# Altium PCB BrakelightPCB.PcbDoc
Units mil, origin at the board's own origin, x right, y up, seen from the top; angles counter-clockwise.
Board outline 5980 x 3985 mil, 2 copper layers (Top Layer, Bottom Layer); 62 components, 43 nets, 128 pads, 0 vias.
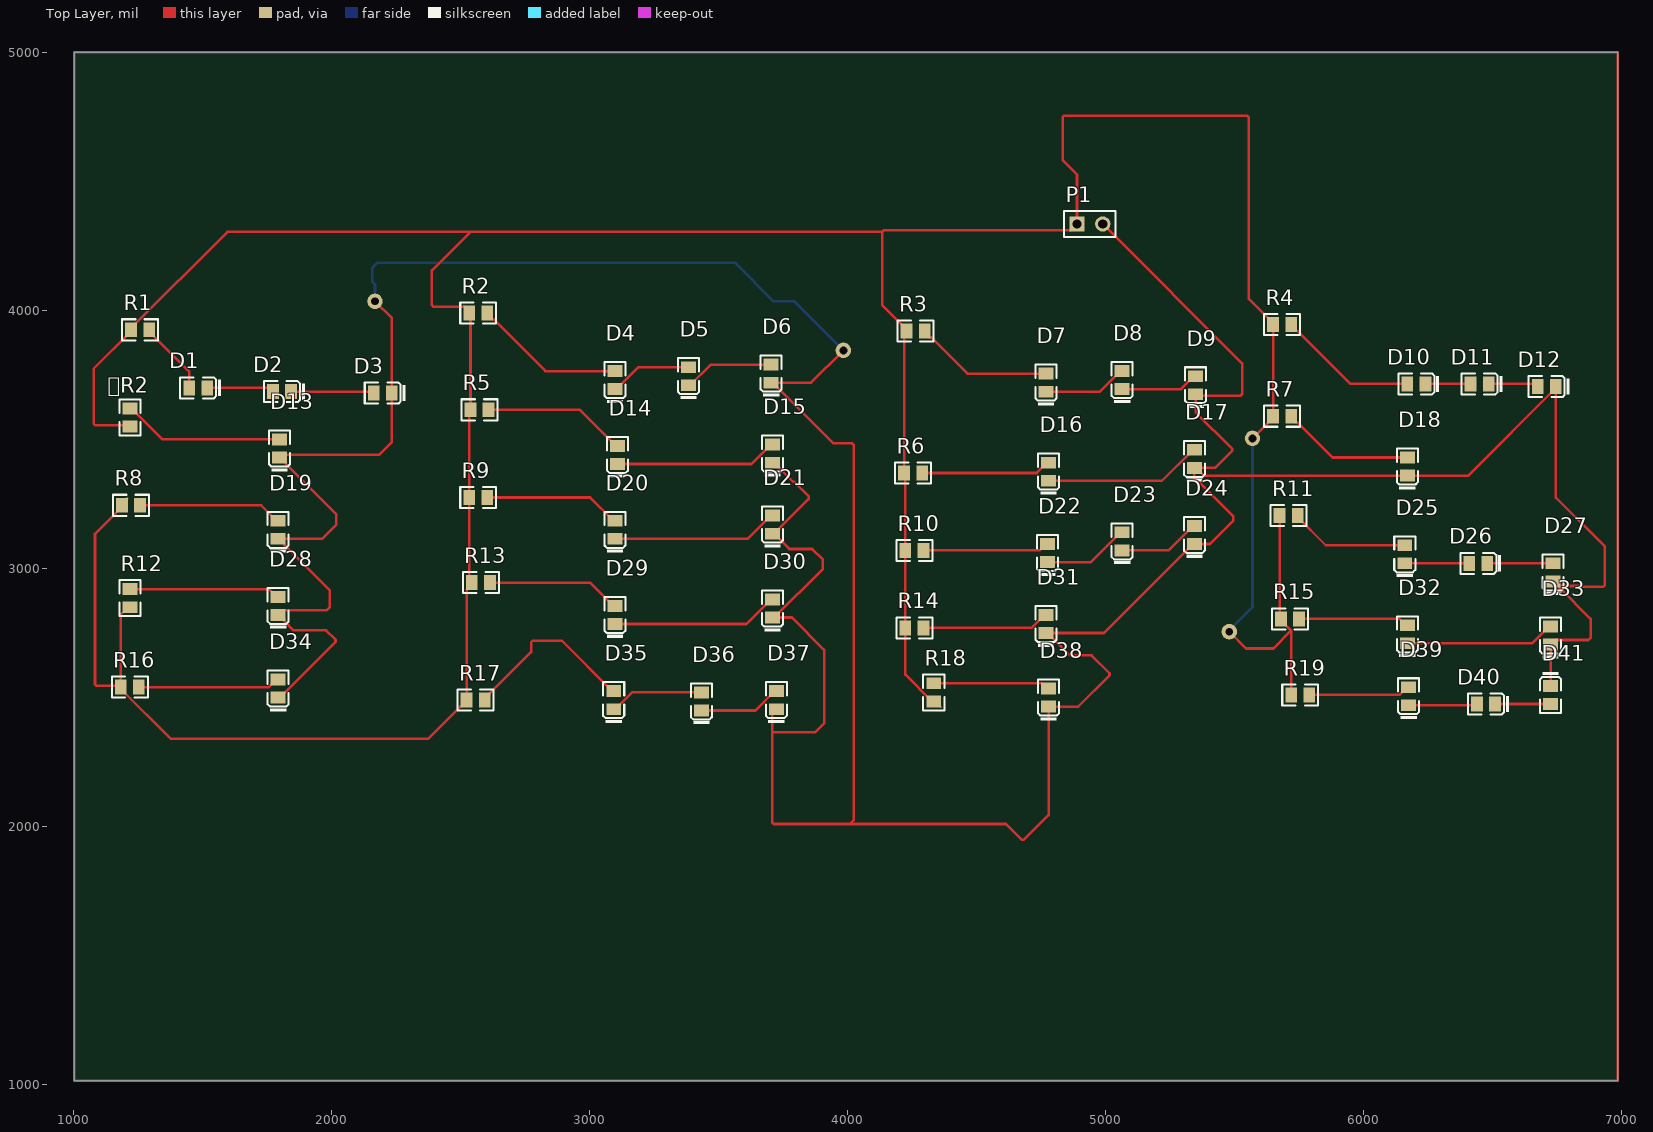
[diagram p0: Top Layer view]
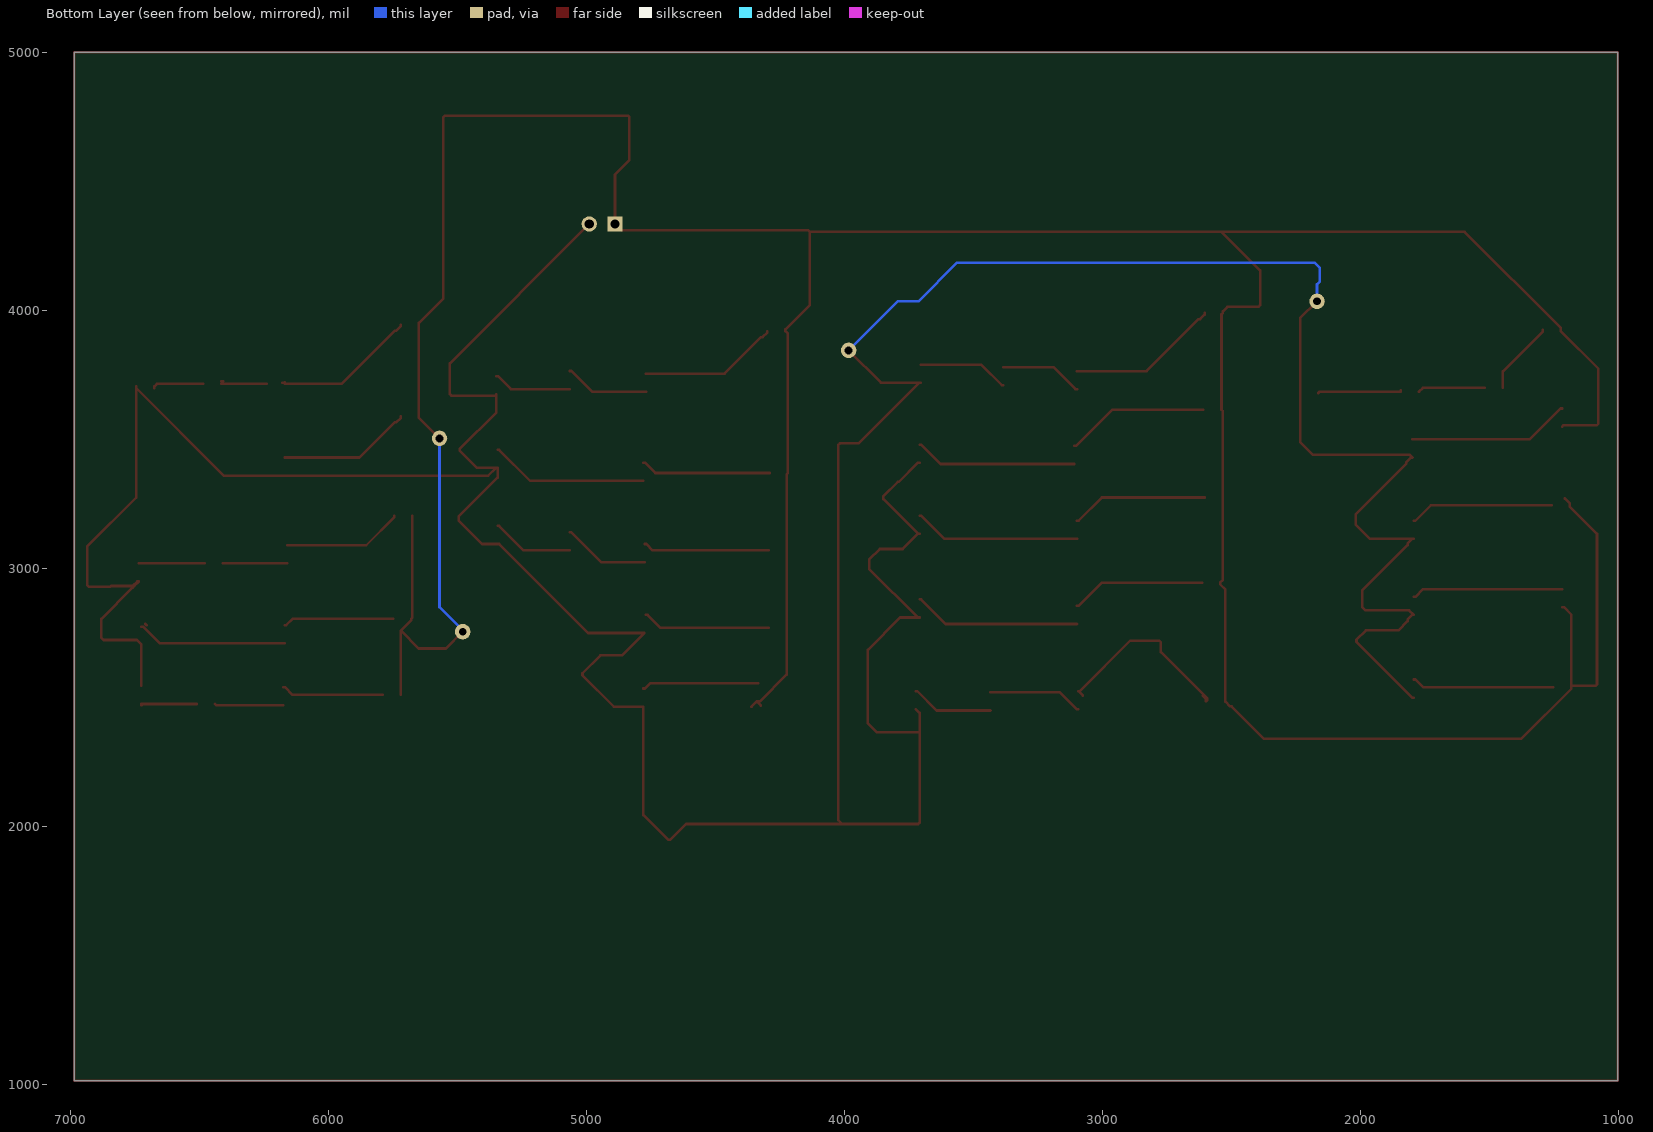
[diagram p1: Bottom Layer view, seen from below]
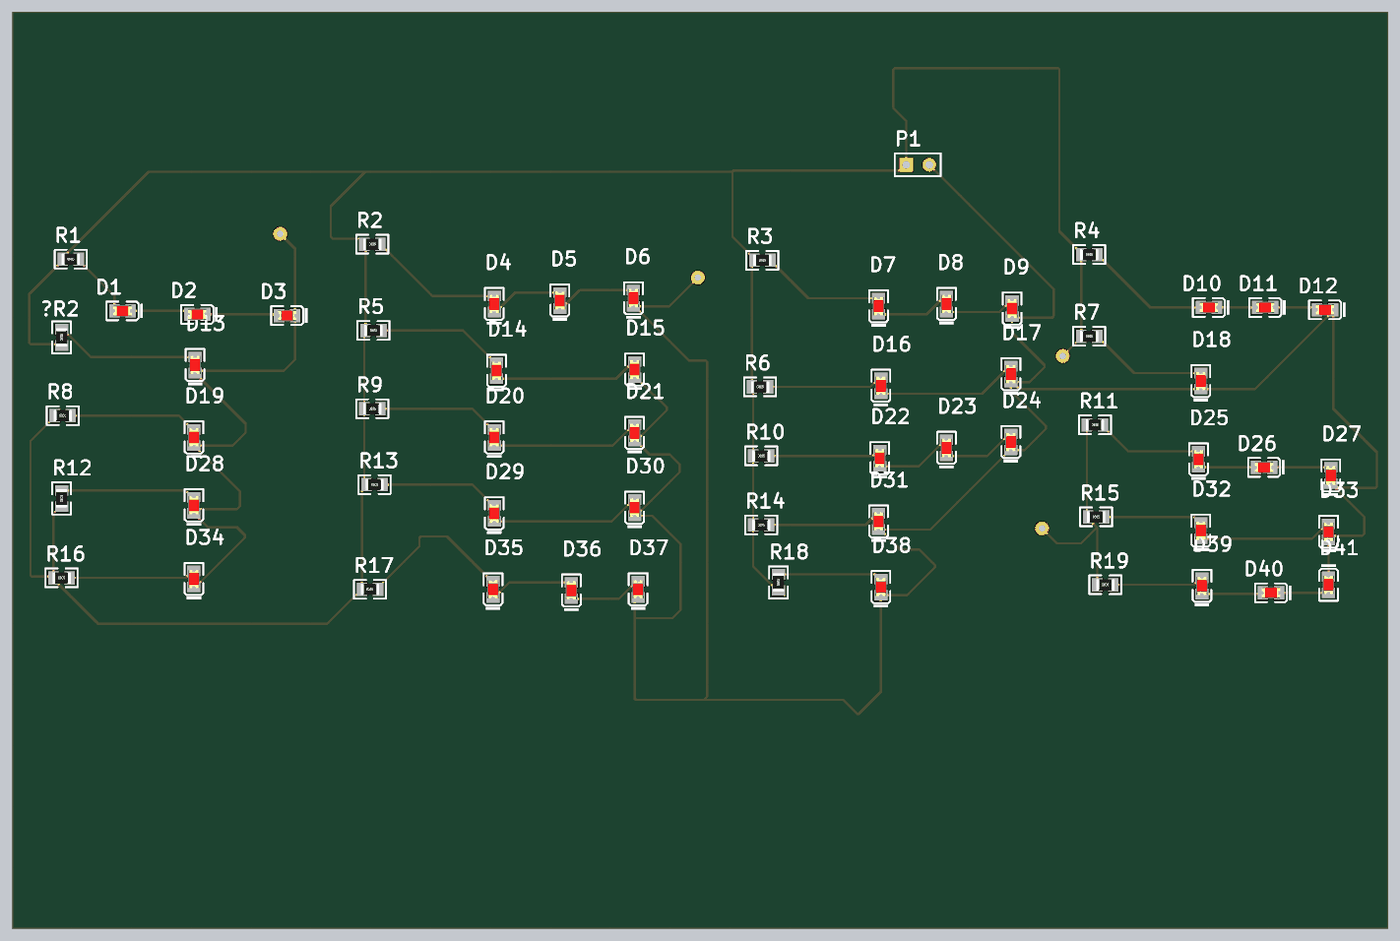
[diagram p2: 3D render of the assembled board from above, using the file's embedded part models]

## Layer stack, top to bottom
Top Solder: solder mask 0.4, Solder Resist, Dk 3.5
Top Layer: signal copper 1.4
Dielectric 1: dielectric 12.6, FR-4, Dk 4.8
Bottom Layer: signal copper 1.4
Bottom Solder: solder mask 0.4, Solder Resist, Dk 3.5

## Board outline
1005,1015 1005,5000 6985,5000 6985,1015

## Design rules (kind name [scope] priority, off if disabled: settings)
Clearance [All] p1: gap=10 ignorepadtopadclearanceinfootprint=FALSE except(0: Arc-Hole Track-Hole SMDPad-Hole THPad-Hole Via-Hole Fill-Hole Poly-Hole Region-Hole Text-Hole)
PolygonConnect [All] p1: connectstyle=Relief reliefconductorwidth=10 reliefentries=4 polygonreliefangle="90 Angle" airgapwidth=10
RoutingVias [All] p1: holewidth=28 width=50 viastyle="Through Hole" minholewidth=28 minwidth=50 maxholewidth=28 maxwidth=50
SolderMaskExpansion [All] p1: expansion=4 istentingtop=FALSE
Width [All] p1: maxlimit=10 minlimit=10 preferedwidth=10
30 further rules are at their usual default settings.

## Classes and differential pairs
component class BrakeLight: R2 D1 D2 D3 D4 D5 D6 D7 D8 D9 D10 D11 D12 D13 D14 D15 D16 D17 D18 D19 D20 D21 D22 D23 D24 D25 D26 D27 D28 D29 D30 D31 D32 D33 D34 D35 D36 D37 D38 D39 D40 D41 D? P1 R1 R2 R3 R4 R5 R6 R7 R8 R10 R11 R14 R16

## Components (designator, comment, footprint, x,y, rotation, side; value= is the part's Value field where it differs from the comment)
R2 "330Ω ±1%" 0805_R 1220,3585 r90 top (schematic designator R1)
D1 "0805 Red" 0805_LED_S1 1485,3700 r180 top
D2 "0805 Red" 0805_LED_S1 1809.96,3685 r180 top
D3 "0805 Red" 0805_LED_S1 2200,3680 r180 top
D4 "0805 Red" 0805_LED_S1 3100,3729.96 r90 top
D5 "0805 Red" 0805_LED_S1 3385,3745.04 r90 top
D6 "0805 Red" 0805_LED_S1 3705,3755 r90 top
D7 "0805 Red" 0805_LED_S1 4770,3719.96 r90 top
D8 "0805 Red" 0805_LED_S1 5065,3730.04 r90 top
D9 "0805 Red" 0805_LED_S1 5350,3710 r90 top
D10 "0805 Red" 0805_LED_S1 6204.96,3715 r180 top
D11 "0805 Red" 0805_LED_S1 6450,3715 r180 top
D12 "0805 Red" 0805_LED_S1 6710,3705 r180 top
D13 "0805 Red" 0805_LED_S1 1800,3464.96 r90 top
D14 "0805 Red" 0805_LED_S1 3110,3440.04 r90 top
D15 "0805 Red" 0805_LED_S1 3710,3445 r90 top
D16 "0805 Red" 0805_LED_S1 4780,3374.96 r90 top
D17 "0805 Red" 0805_LED_S1 5345,3424.96 r90 top
D18 "0805 Red" 0805_LED_S1 6170,3394.96 r90 top
D19 "0805 Red" 0805_LED_S1 1795,3149.96 r90 top
D20 "0805 Red" 0805_LED_S1 3100,3149.96 r90 top
D21 "0805 Red" 0805_LED_S1 3710,3169.96 r90 top
D22 "0805 Red" 0805_LED_S1 4775,3059.96 r90 top
D23 "0805 Red" 0805_LED_S1 5065,3105 r90 top
D24 "0805 Red" 0805_LED_S1 5345,3130 r90 top
D25 "0805 Red" 0805_LED_S1 6160,3055.04 r90 top
D26 "0805 Red" 0805_LED_S1 6444.96,3020 r180 top
D27 "0805 Red" 0805_LED_S1 6735,2984.96 r90 top
D28 "0805 Red" 0805_LED_S1 1795,2855.04 r90 top
D29 "0805 Red" 0805_LED_S1 3100,2819.96 r90 top
D30 "0805 Red" 0805_LED_S1 3710,2845 r90 top
D31 "0805 Red" 0805_LED_S1 4770,2785 r90 top
D32 "0805 Red" 0805_LED_S1 6170,2745 r90 top
D33 "0805 Red" 0805_LED_S1 6725,2740 r90 top
D34 "0805 Red" 0805_LED_S1 1795,2534.96 r90 top
D35 "0805 Red" 0805_LED_S1 3095,2490 r90 top
D36 "0805 Red" 0805_LED_S1 3435,2484.96 r90 top
D37 "0805 Red" 0805_LED_S1 3725,2490 r90 top
D38 "0805 Red" 0805_LED_S1 4780,2499.96 r90 top
D39 "0805 Red" 0805_LED_S1 6175,2505 r90 top
D40 "0805 Red" 0805_LED_S1 6475,2475 r180 top
D41 "0805 Red" 0805_LED_S1 6725,2510 r270 top
P1 "Header 2" HDR1X2 4890,4335 r0 top
R1 "150Ω ±1%" 0805_R 1260,3925 r0 top
R2 "150Ω ±1%" 0805_R 2570,3990 r0 top
R3 "150Ω ±1%" 0805_R 4265,3920 r0 top
R4 "150Ω ±1%" 0805_R 5685,3945 r0 top
R5 "220Ω ±1%" 0805_R 2575.04,3615 r0 top
R6 "220Ω ±1%" 0805_R 4255,3370 r0 top
R7 "330Ω ±1%" 0805_R 5684.96,3590 r0 top
R8 "330Ω ±1%" 0805_R 1225,3245 r0 top
R9 "220Ω ±1%" 0805_R 2570.04,3275 r0 top
R10 "150Ω ±1%" 0805_R 4260,3070 r0 top
R11 "150Ω ±1%" 0805_R 5709.96,3205 r0 top
R12 "330Ω ±1%" 0805_R 1220,2884.96 r90 top
R13 "220Ω ±1%" 0805_R 2580.04,2945 r0 top
R14 "330Ω ±1%" 0805_R 4259.96,2770 r0 top
R15 "220Ω ±1%" 0805_R 5715,2805 r0 top
R16 "330Ω ±1%" 0805_R 1220,2540 r0 top
R17 "150Ω ±1%" 0805_R 2560,2490 r0 top
R18 "330Ω ±1%" 0805_R 4335,2520 r90 top
R19 "150Ω ±1%" 0805_R 5754.96,2510 r0 top

## Footprints (in the part's own frame and the unit in brackets; to place one, negate y for a bottom-side part, rotate by r counter-clockwise, add the part's x,y. Pads: shape width x height; smd on the part's side, far side on the other; paste and mask are expansions set on the pad)
0805_LED_S1 [mm]
  rect 1.16x1.47 smd: A(0.89,0) K(-0.89,0)
  silkscreen extent -2.25,-1.04 1.77,1.03, body extent -1.01,-0.62 1.01,0.62, height 1.1
0805_R [mm]
  rect 1.16x1.47 smd: 1(-0.89,0) 2(0.89,0)
  silkscreen extent -1.77,-1.04 1.77,1.03, body extent -1,-0.62 1,0.63, height 0.49
HDR1X2 [mm] "Connector; Header; 2 Position"
  rect 1.5x1.5 hole 0.9: 1(0,0)
  round 1.5 hole 0.9: 2(2.54,0)
  silkscreen extent -1.27,-1.27 3.81,1.27

## Part data
R2 R1 R2 R3 R4 R5 R6 R7 R8 R9 R10 R11 R12 R13 R14 R15 R16 R17 R18 R19: library part "0805 1K (1001) 1%", "Chip resistor", Manufacturer="Uniroyal Elec", Package=0805, PartNumber=0805W8F1001T5E, Power=1/8W, Resistance=1KΩ, SuppliersPartNumber=C17513, Tolerance=1%, ComponentLink1Description="Supplier link", ComponentLink1URL=http://www.szlcsc.com/product/details_18201.html, Supplier=LC
D1 D2 D3 D4 D5 D6 D7 D8 D9 D10 D11 D12 D13 D14 D15 D16 D17 D18 D19 D20 D21 D22 D23 D24 D25 D26 D27 D28 D29 D30 D31 D32 D33 D34 D35 D36 D37 D38 D39 D40 D41: library part "0805 LED Red", "LED", Color=Red, Manufacturer="Foshan NationStar Optoelectronics", Package=0805, PartNumber=FC-2012HRK-620D, SuppliersPartNumber=C84256, ComponentLink1Description=供应商链接, ComponentLink1URL=http://www.szlcsc.com/product/details_2668.html, Supplier=LC
P1: "Header, 2-Pin", LatestRevisionDate=17-Jul-2002, LatestRevisionNote="Re-released for DXP Platform.", Publisher="Altium Limited"

## Free pads (board coordinates)
  round 60 hole 30: 3(2170,4035) 4(3985,3845) 5(5570,3503.98) 6(5480,2755)

## Nets (pads, with @x,y where several pads share a name; then routed paths per layer and width w, separated by ;. In a path a pad name is that pad's centre, name@x,y a point inside that pad or via, vN(x,y) a via of type N, cw(c..) or ccw(c..) an arc to the next point about the centre after c; other vN are vias at no path point)
+12: R2.1 P1.1 pad.5 pad.6 R1.1 R2.1 R3.1 R4.1 R5.1 R6.1 R7.1 R8.1 R9.1 R10.1 R11.1 R12.1 R13.1 R14.1 R15.1 R16.1 R17.1 R18.1 R19.1 | length 15382.7
  Top Layer w10: R8.1@1210,3271.14 1189.96,3251.1 R8.1 1189.96,3238.9 1085,3133.94 1085,2550.86 1090.86,2545 1179.96,2545 R16.1 ; R12.1 1213.9,2849.92 1184.96,2820.98 R16.1 ; R2.1 1214.96,3555 1085.86,3555 1080,3560.86 1080,3773.94 1224.96,3918.9 R1.1 1224.96,3931.1 1598.47,4304.61 2539.61,4304.61 ; R13.1@2545,2938.9 2524.96,2918.86 R17.1 2524.96,2483.9 2507.13,2466.06 2501.02,2466.06 2374.96,2340 1378.86,2340 1184.96,2533.9 R16.1 ; R13.1 2535,2955 R9.1 2535,3610 R5.1 2540,3984.96 R2.1 2534.96,3996.1 2517.13,4013.94 2396.92,4013.94 2390,4020.86 2390,4155 2539.61,4304.61 ; R18.1@4325,2468.86 R18.1@4338.05,2481.91 ; R18.1@4361.14,2464.92 4341.1,2484.96 R18.1 4328.9,2484.96 4224.92,2588.94 R14.1 4224.92,3069.96 R10.1 4224.96,3365 4223.01,3366.95 R6.1 4219.96,3910 R3.1 4229.96,3926.1 4135,4021.06 4135,4304.61 ; pad.6 5545,2690 5650.98,2690 5719.92,2758.94 ; pad.5@5570,3495 pad.5 5649.92,3583.9 R7.1 5649.96,3590.04 R4.1 5649.96,3951.1 5555,4046.06 5555,4749.14 5549.14,4755 4840,4755 4834.14,4749.14 4834.14,4582.26 4890,4526.41 P1.1 4865.47,4310.47 4140.86,4310.47 4135,4304.61 ; R11.1 5674.92,2810.04 R15.1 5679.96,2798.9 5719.92,2758.94 ; R19.1 5719.92,2758.94 ; 2539.61,4304.61 4135,4304.61
  Bottom Layer w10: pad.6@5470,2750 5570,2850 pad.5
GND: D3.K D6.K D9.K D12.K D13.K D15.K D17.K D18.K D19.K D21.K D24.K D27.K D28.K D30.K D31.K D33.K D34.K D37.K D38.K D41.K P1.2 pad.3 pad.4 | length 17290.6
  Top Layer w10: D34.K 1801.1,2499.92 2017.04,2715.86 2017.04,2724.14 1981.08,2760.1 1854.9,2760.1 1818.94,2796.06 1818.94,2802.17 1801.1,2820 D28.K 1812.83,2837.83 1981.98,2837.83 1995,2850.86 1995,2914.92 1818.94,3090.98 1818.94,3097.09 D19.K@1801.1,3114.92 ; D19.K D19.K@1801.1,3114.92 ; pad.3 2235.04,3969.96 D3.K 2235.04,3490.04 2185,3440 1810.08,3440 D13.K 1806.1,3429.92 1823.94,3412.09 1823.94,3405.98 2020,3209.92 2020,3170 1964.92,3114.92 D19.K@1801.1,3114.92 ; D6.K D6.K@3711.1,3719.96 ; D30.K D30.K@3716.1,2809.96 ; D21.K D21.K@3716.1,3134.92 ; D15.K 3716.1,3409.96 3790,3336.06 3793.94,3336.06 3850,3280 3850,3268.82 D21.K@3716.1,3134.92 ; D37.K 3710,2439.96 3710,2365 ; pad.4 3859.96,3719.96 D6.K@3711.1,3719.96 ; P1.2 5530,3795 5530,3675.86 5524.14,3670 5354.96,3670 D9.K 5350,3605 5490.86,3464.14 5490.86,3455.86 5424.92,3389.92 D17.K@5351.1,3389.92 ; D41.K D33.K 6742.83,2722.8 6871.94,2722.8 6880,2730.86 6880,2804.92 6758.94,2925.98 D27.K@6758.94,2932.09 ; D12.K D12.K@6745.04,3698.9 ; 3710,2365 3710,2015.86 3715.86,2010 4010,2010 ; 3710,2365 3875,2365 3910,2400 3910,2685 3785.04,2809.96 D30.K@3716.1,2809.96 ; D6.K@3711.1,3719.96 3946.06,3485 4019.14,3485 4025,3479.14 4025,2025 4010,2010 ; D30.K@3716.1,2809.96 3905,2998.86 3905,3034.14 3863.53,3075.61 3775.41,3075.61 D21.K@3716.1,3134.92 ; 4010,2010 4615,2010 4675.86,1949.14 4684.14,1949.14 4780,2045 D38.K 4894.92,2464.92 5015.86,2585.86 5015.86,2594.14 4946.87,2663.13 4862.93,2663.13 4776.1,2749.96 4993.9,2749.96 5338.9,3094.96 D24.K 5404.96,3094.96 5495.86,3185.86 5495.86,3201.23 5345,3352.09 D17.K D17.K@5351.1,3389.92 ; D17.K@5351.1,3389.92 5381.1,3359.92 D18.K 6406.06,3359.92 D12.K@6745.04,3698.9 ; D12.K@6745.04,3698.9 6745.04,3274.96 6935,3085 6935,2935.86 6929.14,2930 6845.08,2930 6843,2932.09 D27.K@6758.94,2932.09 ; D27.K@6758.94,2932.09 6752.83,2932.09 D27.K 6741.1,2949.92 D27.K@6758.94,2932.09
  Bottom Layer w10: pad.3 2170,4100.91 2159.14,4111.77 2159.14,4164.14 2180,4185 3565,4185 3715,4035 3795,4035 pad.4
NetR1_2: R2.2 D13.A | length 629.7
  Top Layer w10: R2.2 1226.1,3620.04 1346.14,3500 D13.A
NetD1_A: D1.A R1.2 | length 289.2
  Top Layer w10: R1.2 1295.04,3918.9 1449.96,3763.98 D1.A
NetD1_K: D1.K D2.A | length 261.1
  Top Layer w10: D1.K 1759.92,3700 D2.A
NetD2_K: D2.K D3.A | length 328.1
  Top Layer w10: D2.K@1845,3691.1 D2.K 2159.96,3685 D3.A
NetD4_A: D4.A R2.2 | length 591.7
  Top Layer w10: R2.2 2605.04,3983.9 2622.87,3966.06 2628.98,3966.06 2830.04,3765 D4.A
NetD4_K: D4.K D5.A | length 320.3
  Top Layer w10: D4.K 3106.1,3694.92 3191.26,3780.08 D5.A
NetD5_K: D5.K D6.A | length 353.2
  Top Layer w10: D5.K 3391.1,3710 3471.14,3790.04 D6.A
NetD7_A: D7.A R3.2 | length 541.9
  Top Layer w10: R3.2 4300.04,3913.9 4317.87,3896.06 4323.98,3896.06 4465.04,3755 D7.A
NetD7_K: D7.K D8.A | length 328.2
  Top Layer w10: D7.K 4978.74,3684.92 5058.9,3765.08 D8.A
NetD8_K: D8.K D9.A | length 305.7
  Top Layer w10: D8.K 5293.86,3695 5343.9,3745.04 D9.A
NetD10_A: D10.A R4.2 | length 560.9
  Top Layer w10: R4.2 5720.04,3938.9 5737.87,3921.06 5743.98,3921.06 5950.04,3715 D10.A D10.A@6169.92,3721.1 ; D10.A@6173.86,3720 D10.A@6179.96,3720
NetD10_K: D10.K D11.A | length 181.1
  Top Layer w10: D10.K D11.A ; D11.A@6408.9,3725.08 D11.A@6415,3725.08
NetD11_K: D11.K D12.A | length 200.2
  Top Layer w10: D11.K 6664.96,3715 D12.A D12.A@6674.96,3698.9
NetD14_A: D14.A R5.2 | length 557.9
  Top Layer w10: R5.2 2963.98,3615 3103.9,3475.08 D14.A
NetD14_K: D14.K D15.A | length 631.1
  Top Layer w10: D14.K 3628.86,3405 3703.9,3480.04 D15.A
NetD16_A: D16.A R6.2 | length 506.5
  Top Layer w10: R6.2 4733.9,3370 4773.9,3410 D16.A
NetD16_K: D16.K D17.A | length 614.7
  Top Layer w10: D16.K 5218.82,3339.92 5338.9,3460 D17.A
NetD18_A: D18.A R7.2 | length 519.8
  Top Layer w10: R7.2 5720,3583.9 5737.83,3566.06 5743.94,3566.06 5880,3430 D18.A
NetD19_A: D19.A R8.2 | length 559.8
  Top Layer w10: R8.2 1728.9,3245 1788.9,3185 D19.A
NetD20_A: D20.A R9.2 | length 532.2
  Top Layer w10: R9.2 3003.9,3275 3093.9,3185 D20.A
NetD20_K: D20.K D21.A | length 647.3
  Top Layer w10: D20.K 3613.82,3114.92 3703.9,3205 D21.A
NetD22_A: D22.A R10.2 | length 490.3
  Top Layer w10: R10.2 4743.9,3070 4768.9,3095 D22.A
NetD22_K: D22.K D23.A | length 337.7
  Top Layer w10: D22.K 4943.78,3024.92 5058.9,3140.04 D23.A
NetD23_K: D23.K D24.A | length 319.4
  Top Layer w10: D23.K 5243.82,3069.96 5338.9,3165.04 D24.A
NetD25_A: D25.A R11.2 | length 466.2
  Top Layer w10: R11.2 5745,3198.9 5853.82,3090.08 D25.A
NetD25_K: D25.K D26.A | length 249.9
  Top Layer w10: D25.K D26.A
NetD26_K: D26.K D27.A | length 255
  Top Layer w10: D26.K D27.A
NetD28_A: D28.A R12.2 | length 587.4
  Top Layer w10: R12.2 1758.98,2920 1788.9,2890.08 D28.A
NetD29_A: D29.A R13.2 | length 522.2
  Top Layer w10: R13.2 3003.9,2945 3093.9,2855 D29.A
NetD29_K: D29.K D30.A | length 649.4
  Top Layer w10: D29.K 3608.78,2784.92 3703.9,2880.04 D30.A
NetD31_A: D31.A R14.2 | length 495.7
  Top Layer w10: R14.2 4713.86,2770 4763.9,2820.04 D31.A
NetD32_A: D32.A R15.2 | length 430.3
  Top Layer w10: R15.2 6138.94,2805 6163.9,2780.04 D32.A
NetD32_K: D32.K D33.A | length 589.2
  Top Layer w10: D32.K 6653.82,2709.96 6718.9,2775.04 D33.A ; D33.A@6704.88,2779.96 D33.A@6710,2785.08
NetD34_A: D34.A R16.2 | length 552.4
  Top Layer w10: R16.2 1758.9,2540 1788.9,2570 D34.A
NetD35_A: D35.A R17.2 | length 761.7
  Top Layer w10: R17.2 2600,2485 2600,2494.33 R17.2@2612.87,2507.2 ; R17.2 2595.04,2496.1 2775,2676.06 2775,2714.14 2780.86,2720 2893.94,2720 3088.9,2525.04 D35.A D35.A@3077.17,2507.2
NetD35_K: D35.K D36.A | length 366.9
  Top Layer w10: D35.K 3101.1,2454.96 3166.14,2520 D36.A
NetD36_K: D36.K D37.A | length 321.1
  Top Layer w10: D36.K 3643.78,2449.92 3718.9,2525.04 D37.A
NetD38_A: D38.A R18.2 | length 453.3
  Top Layer w10: R18.2 4753.86,2555.04 4773.9,2535 D38.A
NetD39_A: D39.A R19.2 | length 397.4
  Top Layer w10: R19.2 6138.86,2510 6168.9,2540.04 D39.A
NetD39_K: D39.K D40.A | length 267
  Top Layer w10: D39.K 6434.92,2469.96 D40.A
NetD40_K: D40.K D41.A | length 222
  Top Layer w10: D40.K D41.A@6720,2475 ; D41.A@6725,2470 D41.A@6720,2475 ; D41.A D41.A D41.A@6720,2475
copper on no net: | length 19930
  Top Layer w10: 1005,1015 6985,1015 6985,5000 1005,5000 1005,1015